# Altium PCB BuySellDisplay4Rev.PcbDoc (part 1 of 2)
Units mil, origin at the board's own origin, x right, y up, seen from the top; angles counter-clockwise.
Board outline 16511.81 x 6377.95 mil, 2 copper layers (Top Layer, Bottom Layer); 219 components, 209 nets, 584 pads, 70 vias.
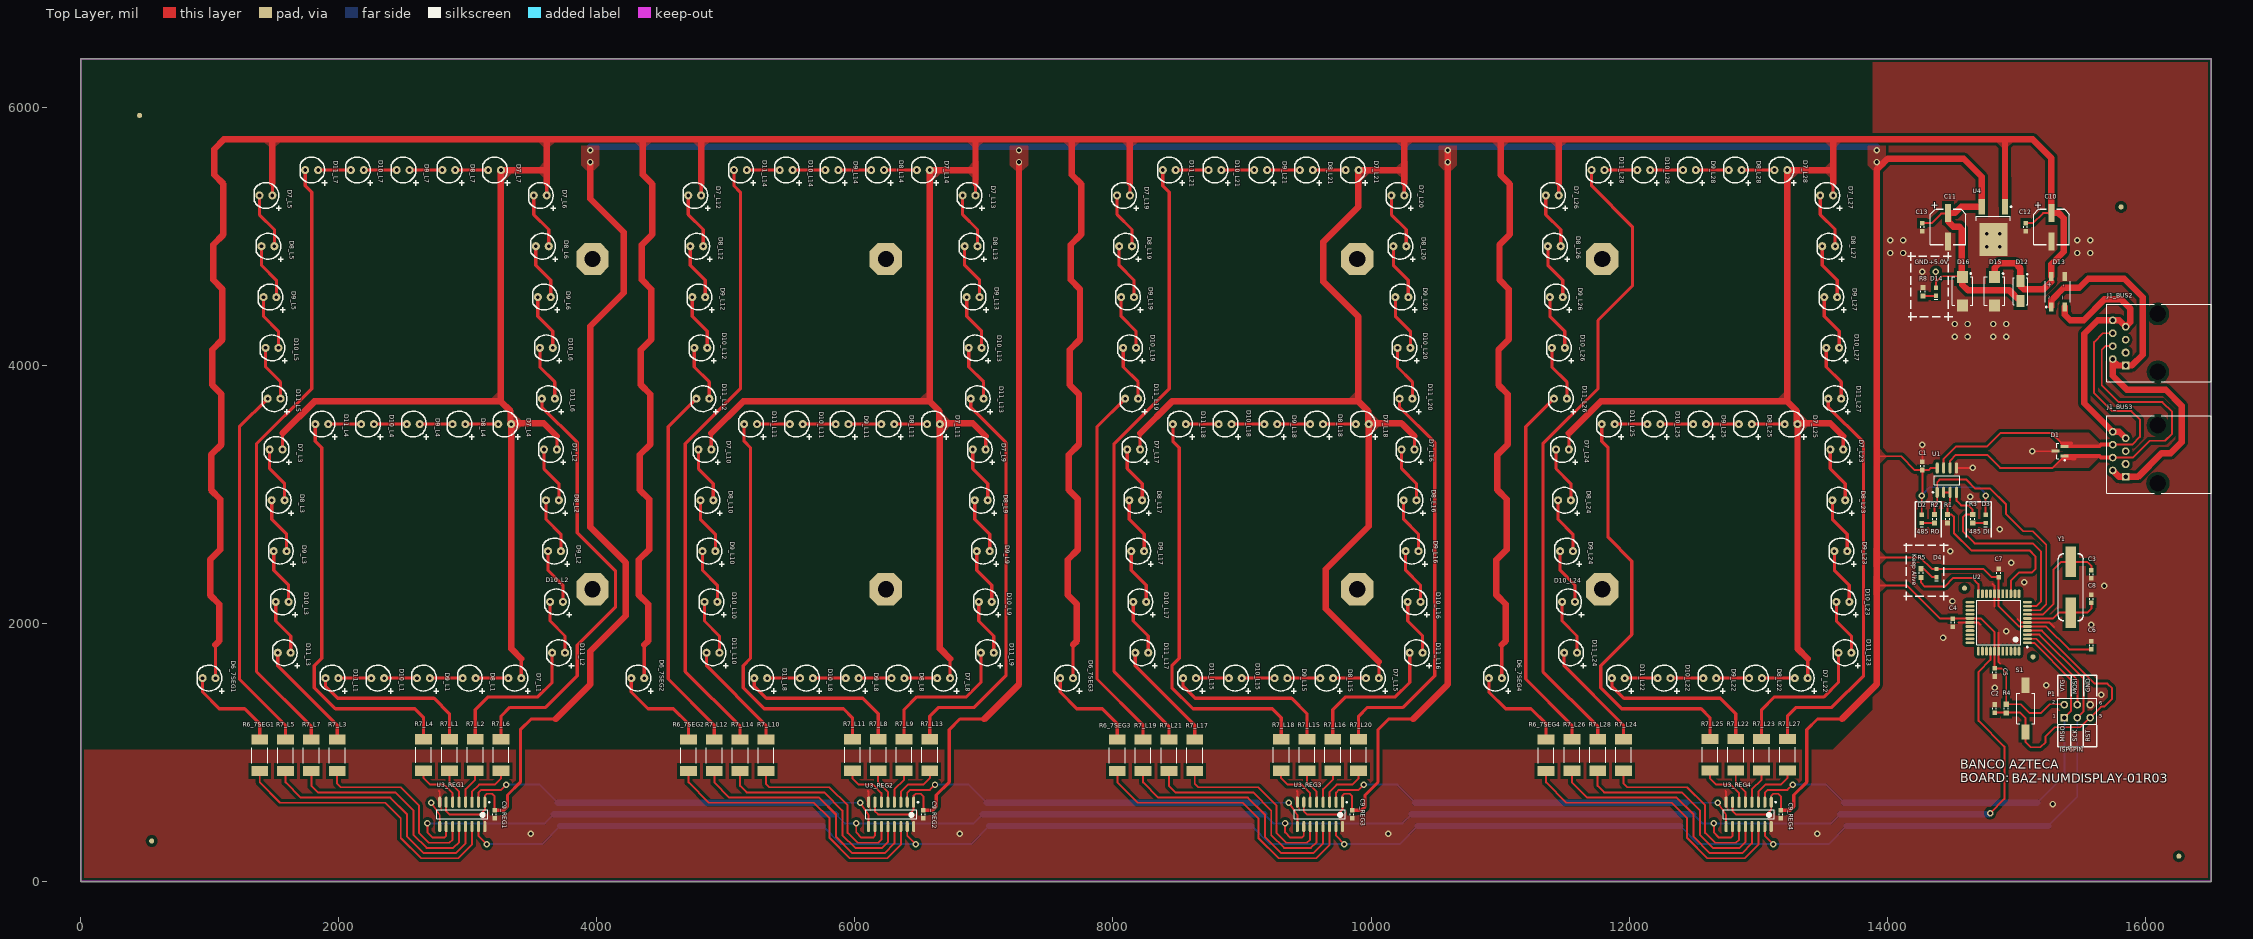
[diagram p0: Top Layer view]
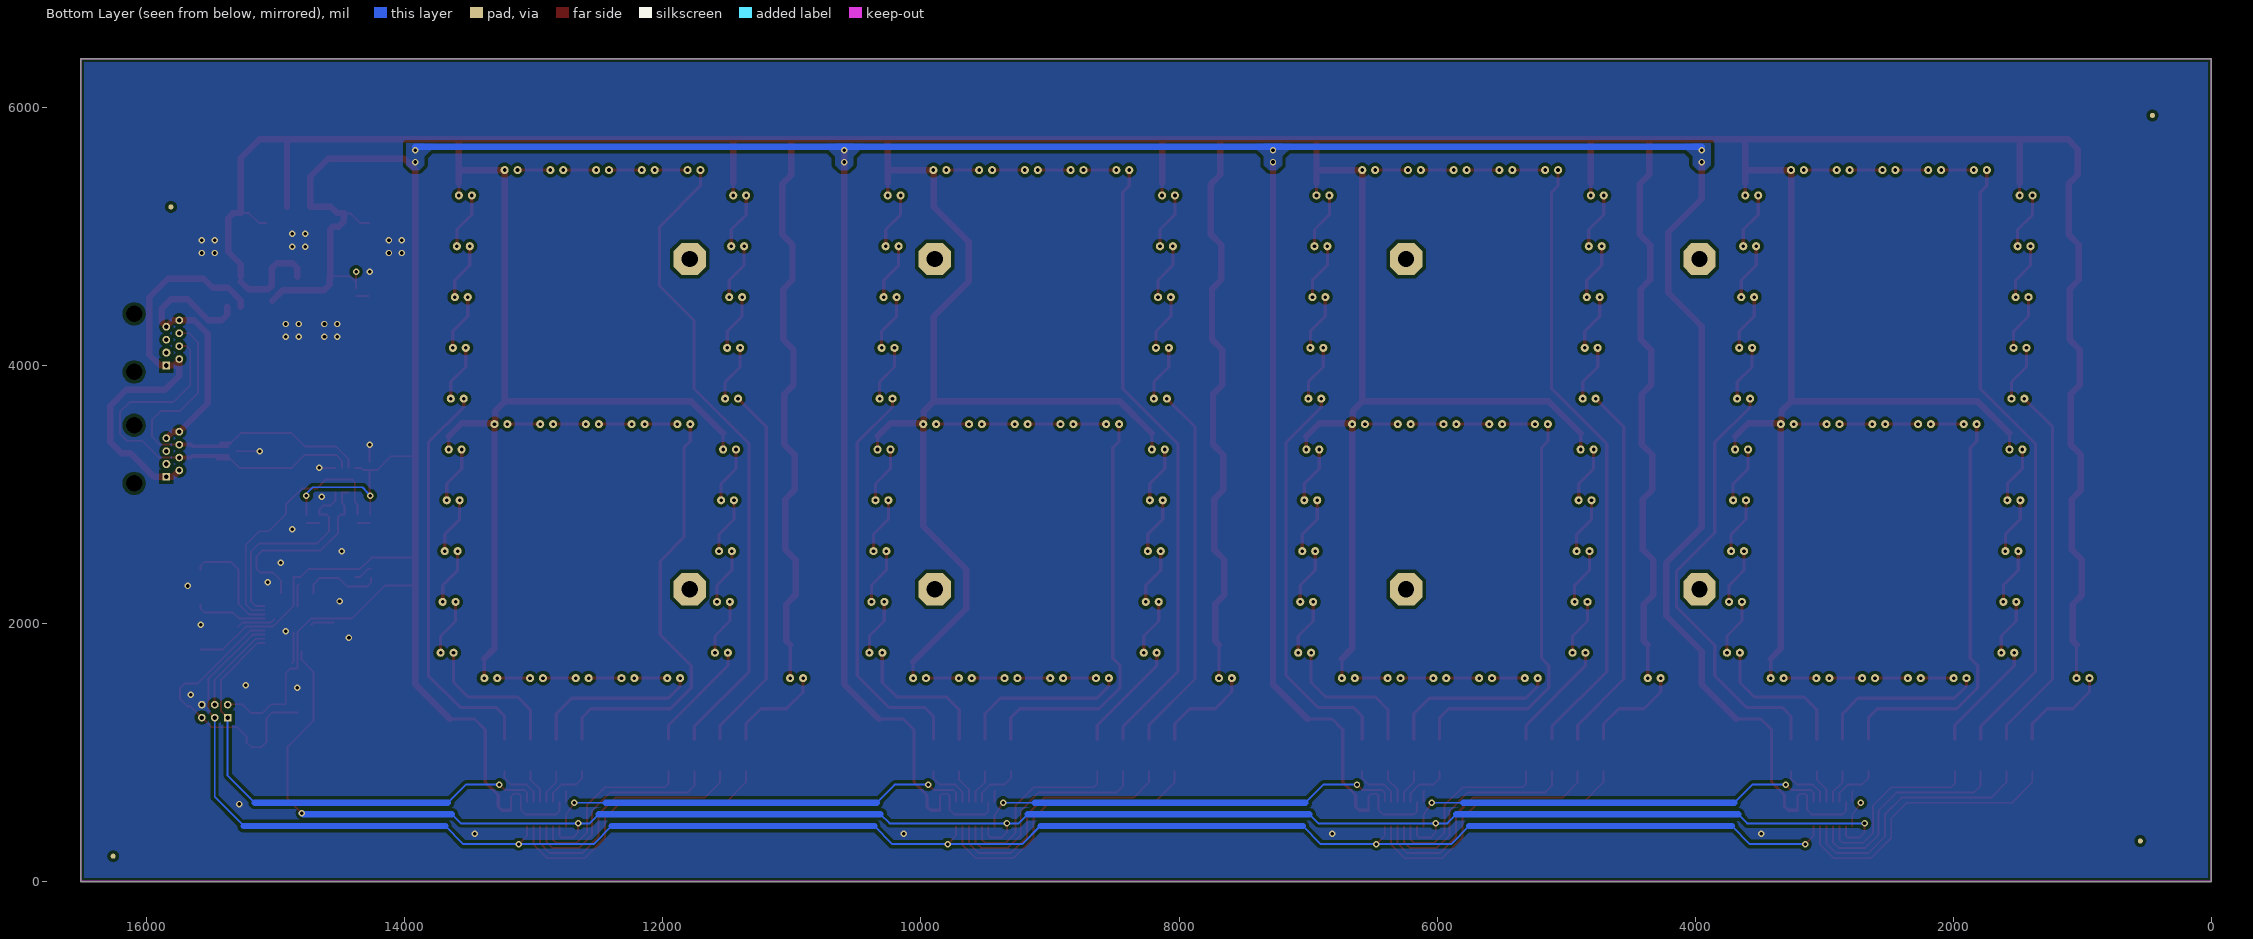
[diagram p1: Bottom Layer view, seen from below]

## Layer stack, top to bottom
Top Layer: signal copper 1.4
Dielectric: dielectric 12.6, FR-4, Dk 4.8
Bottom Layer: signal copper 1.4

## Board outline
16511.81,0 16511.81,6377.95 0,6377.95 0,0

## Design rules (kind name [scope] priority, off if disabled: settings)
Clearance [All] p1: gap=25
ComponentClearance [All] p1: gap=10 collisioncheckmode=3 verticalgap=10
PolygonConnect [All] p1: connectstyle=Direct reliefconductorwidth=15 reliefentries=4 polygonreliefangle="90 Angle"
RoomDefinition SUPPLY [InComponentClass('SUPPLY')] p1: confinementstyle=ConfineIn formatcopy=TRUE lockcomponents=FALSE outline -3977.55,-4179 -1977.55,-4179 -1977.55,-3179 -3977.55,-3179
RoomDefinition REG4 [InComponentClass('REG4')] p2: confinementstyle=ConfineIn formatcopy=TRUE lockcomponents=FALSE outline -3977.55,-4179 -1977.55,-4179 -1977.55,-3179 -3977.55,-3179
RoomDefinition REG3 [InComponentClass('REG3')] p3: confinementstyle=ConfineIn formatcopy=TRUE lockcomponents=FALSE outline -3977.55,-4179 -1977.55,-4179 -1977.55,-3179 -3977.55,-3179
RoomDefinition REG2 [InComponentClass('REG2')] p4: confinementstyle=ConfineIn formatcopy=TRUE lockcomponents=FALSE outline -3977.55,-4179 -1977.55,-4179 -1977.55,-3179 -3977.55,-3179
RoomDefinition REG1 [InComponentClass('REG1')] p5: confinementstyle=ConfineIn formatcopy=TRUE lockcomponents=FALSE outline -3977.55,-4179 -1977.55,-4179 -1977.55,-3179 -3977.55,-3179
RoomDefinition L28 [InComponentClass('L28')] p6: confinementstyle=ConfineIn formatcopy=TRUE lockcomponents=FALSE outline -3977.55,-4179 -1977.55,-4179 -1977.55,-3179 -3977.55,-3179
RoomDefinition L27 [InComponentClass('L27')] p7: confinementstyle=ConfineIn formatcopy=TRUE lockcomponents=FALSE outline -3977.55,-4179 -1977.55,-4179 -1977.55,-3179 -3977.55,-3179
RoomDefinition L26 [InComponentClass('L26')] p8: confinementstyle=ConfineIn formatcopy=TRUE lockcomponents=FALSE outline -3977.55,-4179 -1977.55,-4179 -1977.55,-3179 -3977.55,-3179
RoomDefinition L25 [InComponentClass('L25')] p9: confinementstyle=ConfineIn formatcopy=TRUE lockcomponents=FALSE outline -3977.55,-4179 -1977.55,-4179 -1977.55,-3179 -3977.55,-3179
RoomDefinition L24 [InComponentClass('L24')] p10: confinementstyle=ConfineIn formatcopy=TRUE lockcomponents=FALSE outline -3977.55,-4179 -1977.55,-4179 -1977.55,-3179 -3977.55,-3179
RoomDefinition L23 [InComponentClass('L23')] p11: confinementstyle=ConfineIn formatcopy=TRUE lockcomponents=FALSE outline -3977.55,-4179 -1977.55,-4179 -1977.55,-3179 -3977.55,-3179
RoomDefinition L22 [InComponentClass('L22')] p12: confinementstyle=ConfineIn formatcopy=TRUE lockcomponents=FALSE outline -3977.55,-4179 -1977.55,-4179 -1977.55,-3179 -3977.55,-3179
RoomDefinition L21 [InComponentClass('L21')] p13: confinementstyle=ConfineIn formatcopy=TRUE lockcomponents=FALSE outline -3977.55,-4179 -1977.55,-4179 -1977.55,-3179 -3977.55,-3179
RoomDefinition L20 [InComponentClass('L20')] p14: confinementstyle=ConfineIn formatcopy=TRUE lockcomponents=FALSE outline -3977.55,-4179 -1977.55,-4179 -1977.55,-3179 -3977.55,-3179
RoomDefinition L19 [InComponentClass('L19')] p15: confinementstyle=ConfineIn formatcopy=TRUE lockcomponents=FALSE outline -3977.55,-4179 -1977.55,-4179 -1977.55,-3179 -3977.55,-3179
RoomDefinition L18 [InComponentClass('L18')] p16: confinementstyle=ConfineIn formatcopy=TRUE lockcomponents=FALSE outline -3977.55,-4179 -1977.55,-4179 -1977.55,-3179 -3977.55,-3179
RoomDefinition L17 [InComponentClass('L17')] p17: confinementstyle=ConfineIn formatcopy=TRUE lockcomponents=FALSE outline -3977.55,-4179 -1977.55,-4179 -1977.55,-3179 -3977.55,-3179
RoomDefinition L16 [InComponentClass('L16')] p18: confinementstyle=ConfineIn formatcopy=TRUE lockcomponents=FALSE outline -3977.55,-4179 -1977.55,-4179 -1977.55,-3179 -3977.55,-3179
RoomDefinition L15 [InComponentClass('L15')] p19: confinementstyle=ConfineIn formatcopy=TRUE lockcomponents=FALSE outline -3977.55,-4179 -1977.55,-4179 -1977.55,-3179 -3977.55,-3179
RoomDefinition L14 [InComponentClass('L14')] p20: confinementstyle=ConfineIn formatcopy=TRUE lockcomponents=FALSE outline -3977.55,-4179 -1977.55,-4179 -1977.55,-3179 -3977.55,-3179
RoomDefinition L13 [InComponentClass('L13')] p21: confinementstyle=ConfineIn formatcopy=TRUE lockcomponents=FALSE outline -3977.55,-4179 -1977.55,-4179 -1977.55,-3179 -3977.55,-3179
RoomDefinition L12 [InComponentClass('L12')] p22: confinementstyle=ConfineIn formatcopy=TRUE lockcomponents=FALSE outline -3977.55,-4179 -1977.55,-4179 -1977.55,-3179 -3977.55,-3179
RoomDefinition L11 [InComponentClass('L11')] p23: confinementstyle=ConfineIn formatcopy=TRUE lockcomponents=FALSE outline -3977.55,-4179 -1977.55,-4179 -1977.55,-3179 -3977.55,-3179
RoomDefinition L10 [InComponentClass('L10')] p24: confinementstyle=ConfineIn formatcopy=TRUE lockcomponents=FALSE outline -3977.55,-4179 -1977.55,-4179 -1977.55,-3179 -3977.55,-3179
RoomDefinition L9 [InComponentClass('L9')] p25: confinementstyle=ConfineIn formatcopy=TRUE lockcomponents=FALSE outline -3977.55,-4179 -1977.55,-4179 -1977.55,-3179 -3977.55,-3179
RoomDefinition L8 [InComponentClass('L8')] p26: confinementstyle=ConfineIn formatcopy=TRUE lockcomponents=FALSE outline -3977.55,-4179 -1977.55,-4179 -1977.55,-3179 -3977.55,-3179
RoomDefinition L7 [InComponentClass('L7')] p27: confinementstyle=ConfineIn formatcopy=TRUE lockcomponents=FALSE outline -3977.55,-4179 -1977.55,-4179 -1977.55,-3179 -3977.55,-3179
RoomDefinition L6 [InComponentClass('L6')] p28: confinementstyle=ConfineIn formatcopy=TRUE lockcomponents=FALSE outline -3977.55,-4179 -1977.55,-4179 -1977.55,-3179 -3977.55,-3179
RoomDefinition L5 [InComponentClass('L5')] p29: confinementstyle=ConfineIn formatcopy=TRUE lockcomponents=FALSE outline -3977.55,-4179 -1977.55,-4179 -1977.55,-3179 -3977.55,-3179
RoomDefinition L4 [InComponentClass('L4')] p30: confinementstyle=ConfineIn formatcopy=TRUE lockcomponents=FALSE outline -3977.55,-4179 -1977.55,-4179 -1977.55,-3179 -3977.55,-3179
RoomDefinition L3 [InComponentClass('L3')] p31: confinementstyle=ConfineIn formatcopy=TRUE lockcomponents=FALSE outline -3977.55,-4179 -1977.55,-4179 -1977.55,-3179 -3977.55,-3179
RoomDefinition L2 [InComponentClass('L2')] p32: confinementstyle=ConfineIn formatcopy=TRUE lockcomponents=FALSE outline -3977.55,-4179 -1977.55,-4179 -1977.55,-3179 -3977.55,-3179
RoomDefinition L1 [InComponentClass('L1')] p33: confinementstyle=ConfineIn formatcopy=TRUE lockcomponents=FALSE outline -3977.55,-4179 -1977.55,-4179 -1977.55,-3179 -3977.55,-3179
RoomDefinition CPU [InComponentClass('CPU')] p34: confinementstyle=ConfineIn formatcopy=TRUE lockcomponents=FALSE outline -3977.55,-4179 -1977.55,-4179 -1977.55,-3179 -3977.55,-3179
RoomDefinition COM485 [InComponentClass('COM485')] p35: confinementstyle=ConfineIn formatcopy=TRUE lockcomponents=FALSE outline -3977.55,-4179 -1977.55,-4179 -1977.55,-3179 -3977.55,-3179
RoomDefinition BUS3 [InComponentClass('BUS3')] p36: confinementstyle=ConfineIn formatcopy=TRUE lockcomponents=FALSE outline -3977.55,-4179 -1977.55,-4179 -1977.55,-3179 -3977.55,-3179
RoomDefinition BUS2 [InComponentClass('BUS2')] p37: confinementstyle=ConfineIn formatcopy=TRUE lockcomponents=FALSE outline -3977.55,-4179 -1977.55,-4179 -1977.55,-3179 -3977.55,-3179
RoomDefinition 7SEG4 [InComponentClass('7SEG4')] p38: confinementstyle=ConfineIn formatcopy=TRUE lockcomponents=FALSE outline -3977.55,-4179 -1977.55,-4179 -1977.55,-3179 -3977.55,-3179
RoomDefinition 7SEG3 [InComponentClass('7SEG3')] p39: confinementstyle=ConfineIn formatcopy=TRUE lockcomponents=FALSE outline -3977.55,-4179 -1977.55,-4179 -1977.55,-3179 -3977.55,-3179
RoomDefinition 7SEG2 [InComponentClass('7SEG2')] p40: confinementstyle=ConfineIn formatcopy=TRUE lockcomponents=FALSE outline -3977.55,-4179 -1977.55,-4179 -1977.55,-3179 -3977.55,-3179
RoomDefinition 7SEG1 [InComponentClass('7SEG1')] p41: confinementstyle=ConfineIn formatcopy=TRUE lockcomponents=FALSE outline -3977.55,-4179 -1977.55,-4179 -1977.55,-3179 -3977.55,-3179
RoutingVias [All] p1: holewidth=28 width=50 viastyle="Through Hole" minholewidth=28 minwidth=50 maxholewidth=28 maxwidth=50
SolderMaskExpansion [All] p1: expansion=4
TestPointUsage [All] p1: valid=0 allowmultiple=FALSE
Testpoint [All] p1: side=15 testpointundercomponent=TRUE minsize=40 maxsize=100 preferedsize=60 minholesize=0 maxholesize=40 preferedholesize=32 testpointgrid=1 style=1023 order=0123456789
Width GROUND [(InNet('GND'))] p1: maxlimit=15 minlimit=10 preferedwidth=15
Width Drain [( InNet('SEGA_7SEG1') AND InNet('SEGB_7SEG1') AND InNet('SEGC_7SEG1') AND InNet('SEGD_7SEG1') AND InNet('SEGE_7SEG1') AND InNet('SEGF_7SEG1') AND InNet('SEGG_7SEG1') AND InNet('DOT_7SEG1') AND   InNet('SEGA_7SEG2') AND InNet('SEGB_7SEG2') AND InNet('SEGC_7SEG2') AND InNet('SEGD_7SEG2') AND InNet('SEGE_7SEG2') AND InNet('SEGF_7SEG2') AND InNet('SEGG_7SEG2') AND InNet('DOT_7SEG2') AND  InNet('SEGA_7SEG3') AND InNet('SEGB_7SEG3') AND InNet('SEGC_7SEG3') AND InNet('SEGD_7SEG3') AND InNet('SEGE_7SEG3') AND InNet('SEGF_7SEG3') AND InNet('SEGG_7SEG3') AND InNet('DOT_7SEG3') AND  InNet('SEGA_7SEG4') AND InNet('SEGB_7SEG4') AND InNet('SEGC_7SEG4') AND InNet('SEGD_7SEG4') AND InNet('SEGE_7SEG4') AND InNet('SEGF_7SEG4') AND InNet('SEGG_7SEG4') AND InNet('DOT_7SEG4')   )] p2: maxlimit=15 minlimit=15 preferedwidth=15
Width LEDS_7SEG [(InNet('NetD7_L1_K') AND InNet('NetD7_L2_K') AND InNet('NetD7_L3_K') AND InNet('NetD7_L4_K') AND InNet('NetD7_L5_K') AND InNet('NetD7_L6_K') AND InNet('NetD7_L7_K') AND InNet('NetD7_L8_K') AND InNet('NetD7_L9_K') AND InNet('NetD7_L10_K') AND InNet('NetD7_L11_K') AND InNet('NetD7_L12_K') AND InNet('NetD7_L13_K') AND InNet('NetD7_L14_K') AND InNet('NetD7_L15_K') AND InNet('NetD7_L16_K') AND InNet('NetD7_L17_K') AND InNet('NetD7_L18_K') AND InNet('NetD7_L19_K') AND InNet('NetD7_L20_K') AND InNet('NetD7_L21_K') AND InNet('NetD7_L22_K') AND InNet('NetD7_L23_K') AND InNet('NetD7_L24_K') AND InNet('NetD7_L25_K') AND InNet('NetD7_L26_K') AND InNet('NetD7_L27_K') AND InNet('NetD7_L28_K') AND   InNet('NetD8_L1_K') AND InNet('NetD8_L2_K') AND InNet('NetD8_L3_K') AND InNet('NetD8_L4_K') AND InNet('NetD8_L5_K') AND InNet('NetD8_L6_K') AND InNet('NetD8_L7_K') AND InNet('NetD8_L8_K') AND InNet('NetD8_L9_K') AND InNet('NetD8_L10_K') AND InNet('NetD8_L11_K') AND InNet('NetD8_L12_K') AND InNet('NetD8_L13_K') AND InNet('NetD8_L14_K') AND InNet('NetD8_L15_K') AND InNet('NetD8_L16_K') AND InNet('NetD8_L17_K') AND InNet('NetD8_L18_K') AND InNet('NetD8_L19_K') AND InNet('NetD8_L20_K') AND InNet('NetD8_L21_K') AND InNet('NetD8_L22_K') AND InNet('NetD8_L23_K') AND InNet('NetD8_L24_K') AND InNet('NetD8_L25_K') AND InNet('NetD8_L26_K') AND InNet('NetD8_L27_K') AND InNet('NetD8_L28_K') AND    InNet('NetD9_L1_K') AND InNet('NetD9_L2_K') AND InNet('NetD9_L3_K') AND InNet('NetD9_L4_K') AND InNet('NetD9_L5_K') AND InNet('NetD9_L6_K') AND InNet('NetD9_L7_K') AND InNet('NetD9_L8_K') AND InNet('NetD9_L9_K') AND InNet('NetD9_L10_K') AND InNet('NetD9_L11_K') AND InNet('NetD9_L12_K') AND InNet('NetD9_L13_K') AND InNet('NetD9_L14_K') AND InNet('NetD9_L15_K') AND InNet('NetD9_L16_K') AND InNet('NetD9_L17_K') AND InNet('NetD9_L18_K') AND InNet('NetD9_L19_K') AND InNet('NetD9_L20_K') AND InNet('NetD9_L21_K') AND InNet('NetD9_L22_K') AND InNet('NetD9_L23_K') AND InNet('NetD9_L24_K') AND InNet('NetD9_L25_K') AND InNet('NetD9_L26_K') AND InNet('NetD9_L27_K') AND InNet('NetD9_L28_K') AND    InNet('NetD10_L1_K') AND InNet('NetD10_L2_K') AND InNet('NetD10_L3_K') AND InNet('NetD10_L4_K') AND InNet('NetD10_L5_K') AND InNet('NetD10_L6_K') AND InNet('NetD10_L7_K') AND InNet('NetD10_L8_K') AND InNet('NetD10_L9_K') AND InNet('NetD10_L10_K') AND InNet('NetD10_L11_K') AND InNet('NetD10_L12_K') AND InNet('NetD10_L13_K') AND InNet('NetD10_L14_K') AND InNet('NetD10_L15_K') AND InNet('NetD10_L16_K') AND InNet('NetD10_L17_K') AND InNet('NetD10_L18_K') AND InNet('NetD10_L19_K') AND InNet('NetD10_L20_K') AND InNet('NetD10_L21_K') AND InNet('NetD10_L22_K') AND InNet('NetD10_L23_K') AND InNet('NetD10_L24_K') AND InNet('NetD10_L25_K') AND InNet('NetD10_L26_K') AND InNet('NetD10_L27_K') AND InNet('NetD10_L28_K') AND    InNet('NetD11_L1_K') AND InNet('NetD11_L2_K') AND InNet('NetD11_L3_K') AND InNet('NetD11_L4_K') AND InNet('NetD11_L5_K') AND InNet('NetD11_L6_K') AND InNet('NetD11_L7_K') AND InNet('NetD11_L8_K') AND InNet('NetD11_L9_K') AND InNet('NetD11_L10_K') AND InNet('NetD11_L11_K') AND InNet('NetD11_L12_K') AND InNet('NetD11_L13_K') AND InNet('NetD11_L14_K') AND InNet('NetD11_L15_K') AND InNet('NetD11_L16_K') AND InNet('NetD11_L17_K') AND InNet('NetD11_L18_K') AND InNet('NetD11_L19_K') AND InNet('NetD11_L20_K') AND InNet('NetD11_L21_K') AND InNet('NetD11_L22_K') AND InNet('NetD11_L23_K') AND InNet('NetD11_L24_K') AND InNet('NetD11_L25_K') AND InNet('NetD11_L26_K') AND InNet('NetD11_L27_K') AND InNet('NetD11_L28_K')  )] p3: maxlimit=50 minlimit=20 preferedwidth=50
Width Power [(InNet('POWER_V+') AND InNet('POWER_V-'))] p4: maxlimit=50 minlimit=25 preferedwidth=50
18 further rules are at their usual default settings.

## Classes and differential pairs
component class BUS2: J1_BUS1 J1_BUS2
component class BUS3: J1_BUS3
component class REG1: C9_REG1 U3_REG1
component class REG2: C9_REG2 U3_REG2
component class REG3: C9_REG3 U3_REG3
component class REG4: C9_REG4 U3_REG4
channel class TPIC6B595_CommunicationInterface: REG1 REG2 REG3 REG4
channel class Line: L1 L2 L3 L4 L5 L6 L7 L8 L9 L10 L11 L12 L13 L14 L15 L16 L17 L18 L19 L20 L21 L22 L23 L24 L25 L26 L27 L28
channel class Led7Seg: 7SEG1 7SEG2 7SEG3 7SEG4
channel class BUSConnector: BUS2 BUS3
component class SUPPLY: C10 C11 C12 C13 D12 D13 D14 D15 D16 R8 U4
component class L28: D7_L28 D8_L28 D9_L28 D10_L28 D11_L28 R7_L28
component class L27: D7_L27 D8_L27 D9_L27 D10_L27 D11_L27 R7_L27
component class L26: D7_L26 D8_L26 D9_L26 D10_L26 D11_L26 R7_L26
component class L25: D7_L25 D8_L25 D9_L25 D10_L25 D11_L25 R7_L25
component class L24: D7_L24 D8_L24 D9_L24 D10_L24 D11_L24 R7_L24
component class L23: D7_L23 D8_L23 D9_L23 D10_L23 D11_L23 R7_L23
component class L22: D7_L22 D8_L22 D9_L22 D10_L22 D11_L22 R7_L22
component class L21: D7_L21 D8_L21 D9_L21 D10_L21 D11_L21 R7_L21
component class L20: D7_L20 D8_L20 D9_L20 D10_L20 D11_L20 R7_L20
component class L19: D7_L19 D8_L19 D9_L19 D10_L19 D11_L19 R7_L19
component class L18: D7_L18 D8_L18 D9_L18 D10_L18 D11_L18 R7_L18
component class L17: D7_L17 D8_L17 D9_L17 D10_L17 D11_L17 R7_L17
component class L16: D7_L16 D8_L16 D9_L16 D10_L16 D11_L16 R7_L16
component class L15: D7_L15 D8_L15 D9_L15 D10_L15 D11_L15 R7_L15
component class L14: D7_L14 D8_L14 D9_L14 D10_L14 D11_L14 R7_L14
component class L13: D7_L13 D8_L13 D9_L13 D10_L13 D11_L13 R7_L13
component class L12: D7_L12 D8_L12 D9_L12 D10_L12 D11_L12 R7_L12
component class L11: D7_L11 D8_L11 D9_L11 D10_L11 D11_L11 R7_L11
component class L10: D7_L10 D8_L10 D9_L10 D10_L10 D11_L10 R7_L10
component class L9: D7_L9 D8_L9 D9_L9 D10_L9 D11_L9 R7_L9
component class L8: D7_L8 D8_L8 D9_L8 D10_L8 D11_L8 R7_L8
component class L7: D7_L7 D8_L7 D9_L7 D10_L7 D11_L7 R7_L7
component class L6: D7_L6 D8_L6 D9_L6 D10_L6 D11_L6 R7_L6
component class L5: D7_L5 D8_L5 D9_L5 D10_L5 D11_L5 R7_L5
component class L4: D7_L4 D8_L4 D9_L4 D10_L4 D11_L4 R7_L4
component class L3: D7_L3 D8_L3 D9_L3 D10_L3 D11_L3 R7_L3
component class L2: D7_L2 D8_L2 D9_L2 D10_L2 D11_L2 R7_L2
component class L1: D7_L1 D8_L1 D9_L1 D10_L1 D11_L1 R7_L1
component class CPU: C2 C3 C4 C5 C6 C7 C8 D4 P1 R4 R5 S1 U2 Y1
component class COM485: C1 D1 D2 D3 R1 R2 R3 U1
component class 7SEG4: D6_7SEG4 R6_7SEG4
component class 7SEG3: D6_7SEG3 R6_7SEG3
component class 7SEG2: D6_7SEG2 R6_7SEG2
component class 7SEG1: D6_7SEG1 R6_7SEG1

## Components (designator, comment, footprint, x,y, rotation, side; value= is the part's Value field where it differs from the comment)
C1 "CAP0.1uF" CAP0603 14272.45,3221 r90 top
C2 "CAP0.1uF" CAP0603 14832.45,1341 r90 top
C3 "CAP18pF" CAP0603 15582.45,2381 r270 top
C4 "CAP0.1uF" CAP0603 14509.38,2006.63 r270 top
C5 "CAP0.1uF" CAP0603 14832.45,1621 r270 top
C6 "CAP0.1uF" CAP0603 15582.45,1831 r90 top
C7 "CAP0.1uF" CAP0603 14864.38,2391.63 r90 top
C8 "CAP18pF" CAP0603 15582.45,2191 r90 top
C9_REG1 "CAP0.1uF" CAP0603 3208.32,521 r270 top (schematic designator C9)
C9_REG2 "CAP0.1uF" CAP0603 6531.03,521 r270 top (schematic designator C9)
C9_REG3 "CAP0.1uF" CAP0603 9853.74,521 r270 top (schematic designator C9)
C9_REG4 "CAP0.1uF" CAP0603 13176.45,521 r270 top (schematic designator C9)
C10 "CAP100uF" EEH-ZA1E101XP 15272.45,5071 r270 top
C11 "CAP47uF" EEH-ZA1E101XP 14472.45,5071 r270 top
C12 "CAP0.1uF" CAP0603 15072.45,5071 r270 top
C13 "CAP0.1uF" CAP0603 14272.45,5071 r270 top
D1 "SM712-02HTG" SW712 15339.61,3336 r180 top
D2 "LEDY" 150060YS75000 14267.45,2811 r90 top
D3 "LEDY" 150060YS75000 14762.45,2811 r90 top
D4 "LEDY" 150060YS75000 14382.45,2391 r90 top
D6_7SEG1 "Oval Led" LED 1045.46,1576.91 r180 top (schematic designator D6)
D6_7SEG2 "Oval Led" LED 4368.17,1576.91 r180 top (schematic designator D6)
D6_7SEG3 "Oval Led" LED 7690.88,1576.91 r180 top (schematic designator D6)
D6_7SEG4 "Oval Led" LED 11013.58,1576.91 r180 top (schematic designator D6)
D7_L1 "Oval Led" LED 3415.48,1576.91 r180 top (schematic designator D7)
D7_L2 "Oval Led" LED 3691,3348.56 r180 top (schematic designator D7)
D7_L3 "Oval Led" LED 1565.15,3348.56 r180 top (schematic designator D7)
D7_L4 "Oval Led" LED 3336.74,3545.41 r180 top (schematic designator D7)
D7_L5 "Oval Led" LED 1486.41,5317.06 r180 top (schematic designator D7)
D7_L6 "Oval Led" LED 3612.26,5317.06 r180 top (schematic designator D7)
D7_L7 "Oval Led" LED 3258,5513.91 r180 top (schematic designator D7)
D7_L8 "Oval Led" LED 6738.18,1576.91 r180 top (schematic designator D7)
D7_L9 "Oval Led" LED 7013.71,3348.56 r180 top (schematic designator D7)
D7_L10 "Oval Led" LED 4887.85,3348.56 r180 top (schematic designator D7)
D7_L11 "Oval Led" LED 6659.44,3545.41 r180 top (schematic designator D7)
D7_L12 "Oval Led" LED 4809.11,5317.06 r180 top (schematic designator D7)
D7_L13 "Oval Led" LED 6934.97,5317.06 r180 top (schematic designator D7)
D7_L14 "Oval Led" LED 6580.7,5513.91 r180 top (schematic designator D7)
D7_L15 "Oval Led" LED 10060.89,1576.91 r180 top (schematic designator D7)
D7_L16 "Oval Led" LED 10336.42,3348.56 r180 top (schematic designator D7)
D7_L17 "Oval Led" LED 8210.56,3348.56 r180 top (schematic designator D7)
D7_L18 "Oval Led" LED 9982.28,3545.41 r180 top (schematic designator D7)
D7_L19 "Oval Led" LED 8131.82,5317.06 r180 top (schematic designator D7)
D7_L20 "Oval Led" LED 10257.68,5317.06 r180 top (schematic designator D7)
D7_L21 "Oval Led" LED 9903.41,5513.91 r180 top (schematic designator D7)
D7_L22 "Oval Led" LED 13383.6,1576.91 r180 top (schematic designator D7)
D7_L23 "Oval Led" LED 13659.12,3348.56 r180 top (schematic designator D7)
D7_L24 "Oval Led" LED 11533.27,3348.56 r180 top (schematic designator D7)
D7_L25 "Oval Led" LED 13304.86,3545.41 r180 top (schematic designator D7)
D7_L26 "Oval Led" LED 11454.53,5317.06 r180 top (schematic designator D7)
D7_L27 "Oval Led" LED 13580.38,5317.06 r180 top (schematic designator D7)
D7_L28 "Oval Led" LED 13226.12,5513.91 r180 top (schematic designator D7)
D8_L1 "Oval Led" LED 3061.15,1576.91 r180 top (schematic designator D8)
D8_L2 "Oval Led" LED 3706.75,2954.86 r180 top (schematic designator D8)
D8_L3 "Oval Led" LED 1580.89,2954.86 r180 top (schematic designator D8)
D8_L4 "Oval Led" LED 2982.41,3545.41 r180 top (schematic designator D8)
D8_L5 "Oval Led" LED 1502.15,4923.36 r180 top (schematic designator D8)
D8_L6 "Oval Led" LED 3628.01,4923.36 r180 top (schematic designator D8)
D8_L7 "Oval Led" LED 2903.67,5513.91 r180 top (schematic designator D8)
D8_L8 "Oval Led" LED 6383.85,1576.91 r180 top (schematic designator D8)
D8_L9 "Oval Led" LED 7029.46,2954.86 r180 top (schematic designator D8)
D8_L10 "Oval Led" LED 4903.6,2954.86 r180 top (schematic designator D8)
D8_L11 "Oval Led" LED 6305.11,3545.41 r180 top (schematic designator D8)
D8_L12 "Oval Led" LED 4824.86,4923.36 r180 top (schematic designator D8)
D8_L13 "Oval Led" LED 6950.72,4923.36 r180 top (schematic designator D8)
D8_L14 "Oval Led" LED 6226.37,5513.91 r180 top (schematic designator D8)
D8_L15 "Oval Led" LED 9706.56,1576.91 r180 top (schematic designator D8)
D8_L16 "Oval Led" LED 10352.16,2954.86 r180 top (schematic designator D8)
D8_L17 "Oval Led" LED 8226.31,2954.86 r180 top (schematic designator D8)
D8_L18 "Oval Led" LED 9627.82,3545.41 r180 top (schematic designator D8)
D8_L19 "Oval Led" LED 8147.57,4923.36 r180 top (schematic designator D8)
D8_L20 "Oval Led" LED 10273.42,4923.36 r180 top (schematic designator D8)
D8_L21 "Oval Led" LED 9549.08,5513.91 r180 top (schematic designator D8)
D8_L22 "Oval Led" LED 13029.27,1576.91 r180 top (schematic designator D8)
D8_L23 "Oval Led" LED 13674.87,2954.86 r180 top (schematic designator D8)
D8_L24 "Oval Led" LED 11549.08,2954.86 r180 top (schematic designator D8)
D8_L25 "Oval Led" LED 12950.59,3545.41 r180 top (schematic designator D8)
D8_L26 "Oval Led" LED 11470.34,4923.36 r180 top (schematic designator D8)
D8_L27 "Oval Led" LED 13596.13,4923.36 r180 top (schematic designator D8)
D8_L28 "Oval Led" LED 12871.85,5513.91 r180 top (schematic designator D8)
D9_L1 "Oval Led" LED 2706.81,1576.91 r180 top (schematic designator D9)
D9_L2 "Oval Led" LED 3722.43,2561.16 r180 top (schematic designator D9)
D9_L3 "Oval Led" LED 1596.58,2561.16 r180 top (schematic designator D9)
D9_L4 "Oval Led" LED 2628.07,3545.41 r180 top (schematic designator D9)
D9_L5 "Oval Led" LED 1517.84,4529.66 r180 top (schematic designator D9)
D9_L6 "Oval Led" LED 3643.69,4529.66 r180 top (schematic designator D9)
D9_L7 "Oval Led" LED 2549.33,5513.91 r180 top (schematic designator D9)
D9_L8 "Oval Led" LED 6029.52,1576.91 r180 top (schematic designator D9)
D9_L9 "Oval Led" LED 7045.14,2561.16 r180 top (schematic designator D9)
D9_L10 "Oval Led" LED 4919.29,2561.16 r180 top (schematic designator D9)
D9_L11 "Oval Led" LED 5950.78,3545.41 r180 top (schematic designator D9)
D9_L12 "Oval Led" LED 4840.55,4529.66 r180 top (schematic designator D9)
D9_L13 "Oval Led" LED 6966.4,4529.66 r180 top (schematic designator D9)
D9_L14 "Oval Led" LED 5872.04,5513.91 r180 top (schematic designator D9)
D9_L15 "Oval Led" LED 9352.29,1576.91 r180 top (schematic designator D9)
D9_L16 "Oval Led" LED 10367.85,2561.16 r180 top (schematic designator D9)
D9_L17 "Oval Led" LED 8242,2561.16 r180 top (schematic designator D9)
D9_L18 "Oval Led" LED 9273.49,3545.41 r180 top (schematic designator D9)
D9_L19 "Oval Led" LED 8163.26,4529.66 r180 top (schematic designator D9)
D9_L20 "Oval Led" LED 10289.11,4529.66 r180 top (schematic designator D9)
D9_L21 "Oval Led" LED 9194.75,5513.91 r180 top (schematic designator D9)
D9_L22 "Oval Led" LED 12675,1576.91 r180 top (schematic designator D9)
D9_L23 "Oval Led" LED 13690.56,2561.16 r180 top (schematic designator D9)
D9_L24 "Oval Led" LED 11564.77,2561.16 r180 top (schematic designator D9)
D9_L25 "Oval Led" LED 12596.26,3545.41 r180 top (schematic designator D9)
D9_L26 "Oval Led" LED 11486.03,4529.66 r180 top (schematic designator D9)
D9_L27 "Oval Led" LED 13611.82,4529.66 r180 top (schematic designator D9)
D9_L28 "Oval Led" LED 12517.46,5513.91 r180 top (schematic designator D9)
D10_L1 "Oval Led" LED 2352.48,1576.91 r180 top (schematic designator D10)
D10_L2 "Oval Led" LED 3738.24,2167.46 r180 top (schematic designator D10)
D10_L3 "Oval Led" LED 1612.39,2167.46 r180 top (schematic designator D10)
D10_L4 "Oval Led" LED 2273.74,3545.41 r180 top (schematic designator D10)
D10_L5 "Oval Led" LED 1533.65,4135.96 r180 top (schematic designator D10)
D10_L6 "Oval Led" LED 3659.5,4135.96 r180 top (schematic designator D10)
D10_L7 "Oval Led" LED 2195,5513.91 r180 top (schematic designator D10)
D10_L8 "Oval Led" LED 5675.19,1576.91 r180 top (schematic designator D10)
D10_L9 "Oval Led" LED 7060.95,2167.46 r180 top (schematic designator D10)
D10_L10 "Oval Led" LED 4935.1,2167.46 r180 top (schematic designator D10)
D10_L11 "Oval Led" LED 5596.45,3545.41 r180 top (schematic designator D10)
D10_L12 "Oval Led" LED 4856.36,4135.96 r180 top (schematic designator D10)
D10_L13 "Oval Led" LED 6982.21,4135.96 r180 top (schematic designator D10)
D10_L14 "Oval Led" LED 5517.71,5513.91 r180 top (schematic designator D10)
D10_L15 "Oval Led" LED 8997.96,1576.91 r180 top (schematic designator D10)
D10_L16 "Oval Led" LED 10383.66,2167.46 r180 top (schematic designator D10)
D10_L17 "Oval Led" LED 8257.81,2167.46 r180 top (schematic designator D10)
D10_L18 "Oval Led" LED 8919.16,3545.41 r180 top (schematic designator D10)
D10_L19 "Oval Led" LED 8179.07,4135.96 r180 top (schematic designator D10)
D10_L20 "Oval Led" LED 10304.92,4135.96 r180 top (schematic designator D10)
D10_L21 "Oval Led" LED 8840.42,5513.91 r180 top (schematic designator D10)
D10_L22 "Oval Led" LED 12320.67,1576.91 r180 top (schematic designator D10)
D10_L23 "Oval Led" LED 13706.37,2167.46 r180 top (schematic designator D10)
D10_L24 "Oval Led" LED 11580.51,2167.46 r180 top (schematic designator D10)
D10_L25 "Oval Led" LED 12241.87,3545.41 r180 top (schematic designator D10)
D10_L26 "Oval Led" LED 11501.84,4135.96 r180 top (schematic designator D10)
D10_L27 "Oval Led" LED 13627.57,4135.96 r180 top (schematic designator D10)
D10_L28 "Oval Led" LED 12163.19,5513.91 r180 top (schematic designator D10)
D11_L1 "Oval Led" LED 1998.15,1576.91 r180 top (schematic designator D11)
D11_L2 "Oval Led" LED 3753.99,1773.76 r180 top (schematic designator D11)
D11_L3 "Oval Led" LED 1628.14,1773.76 r180 top (schematic designator D11)
D11_L4 "Oval Led" LED 1919.41,3545.41 r180 top (schematic designator D11)
D11_L5 "Oval Led" LED 1549.4,3742.26 r180 top (schematic designator D11)
D11_L6 "Oval Led" LED 3675.19,3742.26 r180 top (schematic designator D11)
D11_L7 "Oval Led" LED 1840.67,5513.91 r180 top (schematic designator D11)
D11_L8 "Oval Led" LED 5320.86,1576.91 r180 top (schematic designator D11)
D11_L9 "Oval Led" LED 7076.7,1773.76 r180 top (schematic designator D11)
D11_L10 "Oval Led" LED 4950.85,1773.76 r180 top (schematic designator D11)
D11_L11 "Oval Led" LED 5242.12,3545.41 r180 top (schematic designator D11)
D11_L12 "Oval Led" LED 4872.11,3742.26 r180 top (schematic designator D11)
D11_L13 "Oval Led" LED 6997.9,3742.26 r180 top (schematic designator D11)
D11_L14 "Oval Led" LED 5163.38,5513.91 r180 top (schematic designator D11)
D11_L15 "Oval Led" LED 8643.57,1576.91 r180 top (schematic designator D11)
D11_L16 "Oval Led" LED 10399.41,1773.76 r180 top (schematic designator D11)
D11_L17 "Oval Led" LED 8273.55,1773.76 r180 top (schematic designator D11)
D11_L18 "Oval Led" LED 8564.83,3545.41 r180 top (schematic designator D11)
D11_L19 "Oval Led" LED 8194.81,3742.26 r180 top (schematic designator D11)
D11_L20 "Oval Led" LED 10320.61,3742.26 r180 top (schematic designator D11)
D11_L21 "Oval Led" LED 8486.09,5513.91 r180 top (schematic designator D11)
D11_L22 "Oval Led" LED 11966.28,1576.91 r180 top (schematic designator D11)
D11_L23 "Oval Led" LED 13722.12,1773.76 r180 top (schematic designator D11)
D11_L24 "Oval Led" LED 11596.26,1773.76 r180 top (schematic designator D11)
D11_L25 "Oval Led" LED 11887.54,3545.41 r180 top (schematic designator D11)
D11_L26 "Oval Led" LED 11517.52,3742.26 r180 top (schematic designator D11)
D11_L27 "Oval Led" LED 13643.31,3742.26 r180 top (schematic designator D11)
D11_L28 "Oval Led" LED 11808.8,5513.91 r180 top (schematic designator D11)
D12 "S1M-E3/5AT" S1M-E3/5AT 15032.45,4576 r270 top
D13 "MB6S-E3/80" MB6S-E3/80 15322.45,4571 r90 top
D14 "LEDY" 150060YS75000 14377.45,4571 r90 top
D15 "TVS12V" SMBJ5.0A 14832.45,4576 r270 top
D16 "TVS5.0V" SMBJ5.0A 14582.45,4576 r270 top
J1_BUS2 "RJ45" 15-43-6233 16512.45,4174.39 r90 top (schematic designator J1)
J1_BUS3 "RJ45" 15-43-6233 16512.41,3311 r90 top (schematic designator J1)
P1 "ISP" HDR2X3 15372.45,1271 r0 top
R1 "RES4.7K" RES0603 14467.45,2811 r270 top
R2 "RES4.7K" RES0603 14367.45,2811 r90 top
R3 "RES4.7K" RES0603 14662.45,2811 r90 top
R4 "RES4.7K" RES0603 14922.45,1341 r90 top
R5 "RES4.7K" RES0603 14262.45,2391 r90 top
R6_7SEG1 "RES470" RES2512 1388.44,978.12 r270 top (schematic designator R6)
R6_7SEG2 "RES470" RES2512 4711.15,978.12 r270 top (schematic designator R6)
R6_7SEG3 "RES470" RES2512 8033.86,978.12 r270 top (schematic designator R6)
R6_7SEG4 "RES470" RES2512 11356.56,978.12 r270 top (schematic designator R6)
R7_L1 "RES120" RES2512 2858.32,981 r270 top (schematic designator R7)
R7_L2 "RES120" RES2512 3058.32,981 r270 top (schematic designator R7)
R7_L3 "RES120" RES2512 1988.44,978.12 r270 top (schematic designator R7)
R7_L4 "RES120" RES2512 2658.32,981 r270 top (schematic designator R7)
R7_L5 "RES120" RES2512 1588.44,978.12 r270 top (schematic designator R7)
R7_L6 "RES120" RES2512 3258.32,981 r270 top (schematic designator R7)
R7_L7 "RES120" RES2512 1788.44,978.12 r270 top (schematic designator R7)
R7_L8 "RES120" RES2512 6181.03,981 r270 top (schematic designator R7)
R7_L9 "RES120" RES2512 6381.03,981 r270 top (schematic designator R7)
R7_L10 "RES120" RES2512 5311.15,978.12 r270 top (schematic designator R7)
R7_L11 "RES120" RES2512 5981.03,981 r270 top (schematic designator R7)
R7_L12 "RES120" RES2512 4911.15,978.12 r270 top (schematic designator R7)
R7_L13 "RES120" RES2512 6581.03,981 r270 top (schematic designator R7)
R7_L14 "RES120" RES2512 5111.15,978.12 r270 top (schematic designator R7)
R7_L15 "RES120" RES2512 9503.74,981 r270 top (schematic designator R7)
R7_L16 "RES120" RES2512 9703.74,981 r270 top (schematic designator R7)
R7_L17 "RES120" RES2512 8633.86,978.12 r270 top (schematic designator R7)
R7_L18 "RES120" RES2512 9303.74,981 r270 top (schematic designator R7)
R7_L19 "RES120" RES2512 8233.86,978.12 r270 top (schematic designator R7)
R7_L20 "RES120" RES2512 9903.74,981 r270 top (schematic designator R7)
R7_L21 "RES120" RES2512 8433.86,978.12 r270 top (schematic designator R7)
R7_L22 "RES120" RES2512 12826.45,983.95 r270 top (schematic designator R7)
R7_L23 "RES120" RES2512 13026.45,983.95 r270 top (schematic designator R7)
R7_L24 "RES120" RES2512 11956.56,981.07 r270 top (schematic designator R7)
R7_L25 "RES120" RES2512 12626.45,983.95 r270 top (schematic designator R7)
R7_L26 "RES120" RES2512 11556.56,981.07 r270 top (schematic designator R7)
R7_L27 "RES120" RES2512 13226.45,983.95 r270 top (schematic designator R7)
R7_L28 "RES120" RES2512 11756.56,981.07 r270 top (schematic designator R7)
R8 "RES4.7K" RES0603 14277.45,4571 r90 top
S1 "SW-PB" microswitch 15072.45,1341 r90 top
U1 "MAX485CSA" NSO8_N 14462.45,3111 r90 top
U2 "ATmega1284P-AU" 44A_N 14863.55,2008.05 r180 top
U3_REG1 "POWER SHIFT REG" NPIC6C595_Q100_SOIC16 2958.32,521 r270 top (schematic designator U3)
U3_REG2 "POWER SHIFT REG" NPIC6C595_Q100_SOIC16 6281.03,521 r270 top (schematic designator U3)
U3_REG3 "POWER SHIFT REG" NPIC6C595_Q100_SOIC16 9603.74,521 r270 top (schematic designator U3)
U3_REG4 "POWER SHIFT REG" NPIC6C595_Q100_SOIC16 12926.45,521 r270 top (schematic designator U3)
U4 "MC7805CDTRKG" MC7805CDTRKG 14822.45,5071 r270 top
Y1 "XTAL" Crystal20MHz 15422.45,2281 r90 top

## Footprints (in the part's own frame and the unit in brackets; to place one, negate y for a bottom-side part, rotate by r counter-clockwise, add the part's x,y. Pads: shape width x height; smd on the part's side, far side on the other; paste and mask are expansions set on the pad)
15-43-6233 [mm] "Connector; PCB Jack, Thru-Hole; 1-Port; Unshielded without Lightpipes; Right Angle"
  rect 1.5x1.5 hole 0.9: 1(-4.445,16.89)
  round 1.5 hole 0.9: 2(-3.175,19.43) 4(-0.635,19.43) 5(0.635,16.89) 6(1.905,19.43) 7(3.175,16.89) 8(4.445,19.43)
  round 1.6 hole 0.9: 3(-1.905,16.89)
  round 2.95 hole 3.25 unplated: MH1(-5.715,10.54) MH2(5.715,10.54)
  silkscreen extent -7.62,0 7.62,20.58
44A_N [mm] "Thin QFP, 44-Leads, Body 10x10mm, Pitch 0.8mm, IPC Medium Density"
  oval 1.75x0.55 smd: 1(-5.65,4) 2(-5.65,3.2) 3(-5.65,2.4) 4(-5.65,1.6) 5(-5.65,0.8) 6(-5.65,0) 7(-5.65,-0.8) 8(-5.65,-1.6) 9(-5.65,-2.4) 10(-5.65,-3.2) 11(-5.65,-4) 23(5.65,-4) 24(5.65,-3.2) 25(5.65,-2.4) 26(5.65,-1.6) 27(5.65,-0.8) 28(5.65,0) 29(5.65,0.8) 30(5.65,1.6) 31(5.65,2.4) 32(5.65,3.2) 33(5.65,4)
  oval 0.55x1.75 smd: 12(-4,-5.65) 13(-3.2,-5.65) 14(-2.4,-5.65) 15(-1.6,-5.65) 16(-0.8,-5.65) 17(0,-5.65) 18(0.8,-5.65) 19(1.6,-5.65) 20(2.4,-5.65) 21(3.2,-5.65) 22(4,-5.65) 34(4,5.65) 35(3.2,5.65) 36(2.4,5.65) 37(1.6,5.65) 38(0.8,5.65) 39(0,5.65) 40(-0.8,5.65) 41(-1.6,5.65) 42(-2.4,5.65) 43(-3.2,5.65) 44(-4,5.65)
  silkscreen extent -5.77,-4.35 4.35,4.95, body extent -5,-5 5,5, height 1.2
150060YS75000 [mm]
  rect 0.85x0.85 smd: 1(-0.8,0) 2(0.8,0)
  silkscreen extent -1.53,-0.32 -1.53,0.33, body extent -0.85,-0.45 0.85,0.45, height 2.44
CAP0603 [mm] "Capacitores cerámicos de capas múltiples (MLCC) - SMD/SMT 0603 0.1uF 16volts X7R 5%"
  rect 0.9x0.9 smd: 1(-0.8,0) 2(0.8,0)
  silkscreen extent -0.15,-0.35 0.15,0.35, body extent -0.83,-0.43 0.82,0.42, height 0.85
Crystal20MHz [mm]
  rect 6x2 smd: 1(-5,0) 2(5,0)
  silkscreen extent -6.64,-2.45 6.6,2.45, body extent -6.6,-2.4 6.6,2.4, height 4.3
EEH-ZA1E101XP [mm] "EEH-ZA1E101XP"
  rect 3.5x1.2 smd: 1(-2.794,0) 2(2.794,0)
  silkscreen extent -3.5,-3.5 3.5,3.5
HDR2X3 [mm] "Connector; Header; 3x2 Position"
  rect 1.5x1.5 hole 0.9: 1(0,0)
  round 1.5 hole 0.9: 2(0,2.54) 3(2.54,0) 4(2.54,2.54) 5(5.08,0) 6(5.08,2.54)
  silkscreen extent -1.27,-1.27 6.35,3.81
LED [mm]
  round 1.6 hole 0.711: A(0,0) K(2.54,0)
  silkscreen extent -1.78,-2.54 3.56,3.05
MB6S-E3/80 [mm] "MB6S-E3/80"
  rect 1.7x0.85 smd: 1(-3,1.335) 2(-3,-1.335) 3(3,-1.335) 4(3,1.335)
  silkscreen extent -3.12,-2.45 2.05,2.45, body extent -2.05,-2.47 2.05,2.48, height 2.9
MC7805CDTRKG [mm] "MC7805CDTRKG"
  rect 3.05x1.25 smd: 1(-4.05,2.29) 3(-4.05,-2.29)
  rect 6.5x5.55 smd: 4(2.4,0)
  silkscreen extent -4.17,-3.35 -1.25,3.59, body extent -2.5,-3.37 3.72,3.37, height 2.38
microswitch [mm]
  rect 3x1.6 smd: 1(-4.59,0) 2(4.59,0)
  silkscreen extent -3,-1.75 3,1.75, body extent -3,-1.75 3,1.75, height 4.57
NPIC6C595_Q100_SOIC16 [mm]
  oval 2.2x0.6 smd: 1(-2.4,4.445) 2(-2.4,3.175) 3(-2.4,1.905) 4(-2.4,0.635) 5(-2.4,-0.635) 6(-2.4,-1.905) 7(-2.4,-3.175) 8(-2.4,-4.445) 9(2.4,-4.445) 10(2.4,-3.175) 11(2.4,-1.905) 12(2.4,-0.635) 13(2.4,0.635) 14(2.4,1.905) 15(2.4,3.175) 16(2.4,4.445)
  silkscreen extent -2.52,-5 0.9,5.42, body extent -2,-5 2,5, height 1.75
NSO8_N [mm] "SOIC, 8-Leads, Body 4.9x3.9mm, Pitch 1.27mm, IPC Medium Density"
  oval 2.2x0.6 smd: 1(-2.4,1.905) 2(-2.4,0.635) 3(-2.4,-0.635) 4(-2.4,-1.905) 5(2.4,-1.905) 6(2.4,-0.635) 7(2.4,0.635) 8(2.4,1.905)
  silkscreen extent -2.52,-2.5 0.9,2.88, body extent -1.95,-2.45 1.95,2.45, height 1.75
RES0603 [mm]
  rect 1x1 smd: 1(-0.85,0) 2(0.85,0)
  silkscreen extent -0.15,-0.4 0.15,0.4, body extent -0.9,-0.45 0.9,0.45, height 0.55
RES2512 [mm]
  rect 2x3.3 smd: 1(-3.1,0) 2(3.1,0)
  silkscreen extent -1.5,-1.55 1.5,1.55, body extent -3.15,-1.58 3.15,1.57, height 0.7
S1M-E3/5AT [mm] "S1M-E3/5AT"
  rect 2.35x1.55 smd: 1(-1.975,0) 2(1.975,0)
  silkscreen extent -3.42,-1.4 2.65,1.45, body extent -2.64,-1.4 2.64,1.39, height 2.29
SMBJ5.0A [mm]
  rect 2.35x2.2 smd: 1(-2.8,0) 2(2.8,0)
  silkscreen extent -3.57,-2 2.8,2, body extent -2.8,-1.97 2.79,1.97, height 2.44
SW712 [mm] "SM712 Series 600W Asymmetrical TVS Diode Array"
  rect 1.6x0.6 smd: 1(-0.9,0.95) 2(-0.9,-0.95) 3(0.9,0)
  silkscreen extent -1.03,-1.5 0.7,1.92, body extent -0.7,-1.52 0.7,1.52, height 1.12

## Part data
C1 C2 C4 C5 C6 C7 C9_REG1 C9_REG2 C9_REG3 C9_REG4 C12 C13: library part C0.1UF, "Capacitores cerámicos de capas múltiples (MLCC) - SMD/SMT 0603 0.1uF 16volts X7R 5%"
C3 C8: library part C18pF, "GJM0336C1E180JB01D"
C10: library part EEH-ZA1E101XP, "EEH-ZA1E101XP"
C11: library part 25SVPF47M, "25SVPF47M"
D1: library part SM712, "SM712"
D2 D3 D4 D14: library part 150060YS75000, "NPN General Purpose Amplifier"
D6_7SEG1 D6_7SEG2 D6_7SEG3 D6_7SEG4 D7_L1 D7_L2 D7_L3 D7_L4 D7_L5 D7_L6 D7_L7 D7_L8 D7_L9 D7_L10 D7_L11 D7_L12 D7_L13 D7_L14 D7_L15 D7_L16 D7_L17 D7_L18 D7_L19 D7_L20 D7_L21 D7_L22 D7_L23 D7_L24 D7_L25 D7_L26 D7_L27 D7_L28 D8_L1 D8_L2 D8_L3 D8_L4 D8_L5 D8_L6 D8_L7 D8_L8 D8_L9 D8_L10 D8_L11 D8_L12 D8_L13 D8_L14 D8_L15 D8_L16 D8_L17 D8_L18 D8_L19 D8_L20 D8_L21 D8_L22 D8_L23 D8_L24 D8_L25 D8_L26 D8_L27 D8_L28 D9_L1 D9_L2 D9_L3 D9_L4 D9_L5 D9_L6 D9_L7 D9_L8 D9_L9 D9_L10 D9_L11 D9_L12 D9_L13 D9_L14 D9_L15 D9_L16 D9_L17 D9_L18 D9_L19 D9_L20 D9_L21 D9_L22 D9_L23 D9_L24 D9_L25 D9_L26 D9_L27 D9_L28 D10_L1 D10_L2 D10_L3 D10_L4 D10_L5 D10_L6 D10_L7 D10_L8 D10_L9 D10_L10 D10_L11 D10_L12 D10_L13 D10_L14 D10_L15 D10_L16 D10_L17 D10_L18 D10_L19 D10_L20 D10_L21 D10_L22 D10_L23 D10_L24 D10_L25 D10_L26 D10_L27 D10_L28 D11_L1 D11_L2 D11_L3 D11_L4 D11_L5 D11_L6 D11_L7 D11_L8 D11_L9 D11_L10 D11_L11 D11_L12 D11_L13 D11_L14 D11_L15 D11_L16 D11_L17 D11_L18 D11_L19 D11_L20 D11_L21 D11_L22 D11_L23 D11_L24 D11_L25 D11_L26 D11_L27 D11_L28: library part HBLED, "HBLED"
D15: library part SMBJ12A-E3/52, "NPN General Purpose Amplifier"
D16: library part SMBJ5.0A, "NPN General Purpose Amplifier"
J1_BUS2 J1_BUS3: library part 15-43-6233, "Right Angle, Standard Profile, RJ45-Keyed, Flange Mount PCB Jack"
P1: library part "Header 6", "Header, 6-Pin"
R1 R2 R3 R4 R5 R8: library part RK73B1HTTC472J, "RK73B1HTTC472J"
R6_7SEG1 R6_7SEG2 R6_7SEG3 R6_7SEG4: library part CRCW2512470RJNEG, "CRCW2512470RJNEG"
R7_L1 R7_L2 R7_L3 R7_L4 R7_L5 R7_L6 R7_L7 R7_L8 R7_L9 R7_L10 R7_L11 R7_L12 R7_L13 R7_L14 R7_L15 R7_L16 R7_L17 R7_L18 R7_L19 R7_L20 R7_L21 R7_L22 R7_L23 R7_L24 R7_L25 R7_L26 R7_L27 R7_L28: library part CRCW2512120RJNEG, "CRCW2512120RJNEG"
S1: "Switch"
U1: "Low-Power, Slew-Rate-Limited RS-485/RS-422 Transceiver"
U2: "20 MHz 8-bit AVR Microcontroller with 128KB Flash, 44-Pin TQFP Pkg, Industrial Temp"
U3_REG1 U3_REG2 U3_REG3 U3_REG4: library part NPIC6C595, "Power logic 8-bit shift register; open-drain outputs"
Y1: "Crystal Oscillator"

## Free pads (board coordinates)
  oct 250x250 hole 125: 0(3967.91,2265.87) 0(3967.91,4824.92) 0(6240.16,2265.88) 0(6240.17,4824.92) 0(9893.7,2265.87) 0(9893.7,4824.92) 0(11792.13,2265.87) 0(11792.13,4824.92)
  round 39.37 smd mask+39.37: 1(457.44,5936.88) 1(551.18,314.96) 1(15811.77,5228.22) 1(16259.84,196.85)
  round 39.37 smd far side mask+39.37: 1(457.44,5936.88) 1(551.18,314.96) 1(15811.77,5228.22) 1(16259.84,196.85)
  round 39.37 smd mask+29.53: 1(14598.43,2273.99) 1(15129.46,1741.98)

## Via types
v1: diameter 50, hole 28, Top Layer to Bottom Layer, 68 vias
v2: diameter 50, hole 27.99, Top Layer to Bottom Layer, 2 vias

## Nets (pads, with @x,y where several pads share a name; then routed paths per layer and width w, separated by ;. In a path a pad name is that pad's centre, name@x,y a point inside that pad or via, vN(x,y) a via of type N, cw(c..) or ccw(c..) an arc to the next point about the centre after c; other vN are vias at no path point)
20MHZ_1: C3.1 U2.8 Y1.2 | length 866.9
  Top Layer w15: U2.8@15085.99,2071.04 15207.49,2071.04 15287.45,2151 15287.45,2416 15349.3,2477.85 15550.6,2477.85 15582.45,2446 C3.1@15582.45,2412.5
20MHZ_2: C8.1 U2.7 Y1.1 | length 561.6
  Top Layer w15: U2.7@15085.99,2039.54 15285.99,2039.54 15332.45,2086 15422.45,2086 15552.45,2086 15582.45,2116 C8.1@15582.45,2149.5
A: D1.1 J1_BUS2.4 J1_BUS3.4 U1.6 | length 3210.3
  Top Layer w15: U1.6@14487.45,3205.49 14487.45,3261 14532.45,3306 14774.61,3306 14874.61,3206 15282.45,3206 D1.1@15375.05,3298.6 ; J1_BUS2.4@15735.28,4149.39 15690.83,4149.39 15662.45,4121 15662.45,3846 15792.45,3716 16132.45,3716 16207.45,3641 16207.45,3471 16152.45,3416 16032.45,3416 15902.45,3286 J1_BUS3.4@15745.38,3286
  Top Layer w25: 15357.45,3275.99 15452.45,3275.99
  Top Layer w30: D1.1@15375.05,3298.6 15644.89,3298.6 15657.49,3286 J1_BUS3.4@15745.38,3286
B: D1.2 J1_BUS2.6 J1_BUS3.6 U1.7 | length 2920
  Top Layer w15: U1.7@14437.45,3205.49 14437.45,3276 14532.45,3371 14772.45,3371 14877.45,3476 15272.45,3476 15352.45,3396 ; J1_BUS2.6@15735.28,4249.39 15670.83,4249.39 15602.45,4181 15602.45,3786 15742.45,3646 15892.45,3646 15957.45,3581 15957.45,3446 15897.45,3386 J1_BUS3.6@15747.45,3386
  Top Layer w25: 15352.45,3396 15427.45,3396
  Top Layer w30: D1.2@15375.05,3373.4 15644.85,3373.4 15657.45,3386 J1_BUS3.6@15747.45,3386
CLK: P1.3 U2.3 U3_REG1.15 U3_REG2.15 U3_REG3.15 U3_REG4.15 | length 14987.1
  Top Layer w15: U3_REG1.15@3083.32,426.51 3083.32,356 v1(3148.32,291) ; U3_REG2.15@6406.03,426.51 6406.03,356 v1(6471.03,291) ; U3_REG3.15@9728.74,426.51 9728.74,356 v1(9793.74,291) ; U3_REG4.15@13051.45,426.51 13051.45,356 v1(13116.45,291) ; U2.3@15085.99,1913.56 15179.89,1913.56 15522.45,1571 15522.45,1321 P1.3@15472.45,1271
  Bottom Layer w15: v1(3148.32,291) 3578.32,291 3718.32,431 ; 5751.03,431 5891.03,291 6901.03,291 7041.03,431 ; 9073.74,431 9213.74,291 10223.74,291 10363.74,431 ; 12396.45,431 12536.45,291 13546.45,291 13686.45,431 ; 15247.45,431 15472.45,656 P1.3@15472.45,1271
  Bottom Layer w50: 3718.32,431 5751.03,431 ; 7041.03,431 9073.74,431 ; 10363.74,431 12396.45,431 ; 13686.45,431 15247.45,431
COM_485_EN: R1.1 U1.2 U1.3 U2.14 | length 1545.3
  Top Layer w15: U1.2@14437.45,3016.51 U1.3@14487.45,3016.51 14487.45,2936 14467.45,2916 R1.1@14467.45,2844.46 14498.98,2844.46 14517.45,2826 14517.45,2701 14652.45,2566 15102.45,2566 15147.45,2521 15147.45,2421 15122.45,2396 15022.45,2396 14957.45,2331 U2.14@14957.45,2230.49
DI: R3.2 U1.4 U2.10 | length 1629.7
  Top Layer w15: U1.4@14537.45,3016.51 14537.45,2951 14572.45,2916 14627.45,2916 14662.45,2881 R3.2@14662.45,2844.46 14605.91,2844.46 14587.45,2826 14587.45,2711 14677.45,2621 15127.45,2621 15192.45,2556 15192.45,2171 15155.48,2134.03 U2.10@15085.99,2134.03
DOT_7SEG1: R6_7SEG1.2 U3_REG1.14 | length 2249.1
  Top Layer w15: R6_7SEG1.2@1388.44,856.07 1388.44,768.12 1545.56,611 2360.32,611 2481.32,490 2481.32,338 2638.32,181 2928.32,181 3033.32,286 U3_REG1.14@3033.32,426.51
DOT_7SEG2: R6_7SEG2.2 U3_REG2.14 | length 2249.1
  Top Layer w15: R6_7SEG2.2@4711.15,856.07 4711.15,768.12 4868.26,611 5683.03,611 5804.03,490 5804.03,338 5961.03,181 6251.03,181 6356.03,286 U3_REG2.14@6356.03,426.51
DOT_7SEG3: R6_7SEG3.2 U3_REG3.14 | length 2249.1
  Top Layer w15: R6_7SEG3.2@8033.86,856.07 8033.86,768.12 8190.97,611 9005.74,611 9126.74,490 9126.74,338 9283.74,181 9573.74,181 9678.74,286 U3_REG3.14@9678.74,426.51
DOT_7SEG4: R6_7SEG4.2 U3_REG4.14 | length 2249.1
  Top Layer w15: R6_7SEG4.2@11356.56,856.07 11356.56,768.12 11513.68,611 12328.45,611 12449.45,490 12449.45,338 12606.45,181 12896.45,181 13001.45,286 U3_REG4.14@13001.45,426.51
EXTSUPP: C10.1 C12.1 D6_7SEG1.A D6_7SEG2.A D6_7SEG3.A D6_7SEG4.A D7_L1.A D7_L2.A D7_L3.A D7_L4.A D7_L5.A D7_L6.A D7_L7.A D7_L8.A D7_L9.A D7_L10.A D7_L11.A D7_L12.A D7_L13.A D7_L14.A D7_L15.A D7_L16.A D7_L17.A D7_L18.A D7_L19.A D7_L20.A D7_L21.A D7_L22.A D7_L23.A D7_L24.A D7_L25.A D7_L26.A D7_L27.A D7_L28.A D12.1 D13.4 D15.1 U4.1 | length 66388.8
  Top Layer w15: C12.1@15072.45,5102.5 15128.94,5102.5 15207.45,5181 C10.1@15272.45,5181
  Top Layer w25: D6_7SEG1.A@1045.46,1576.91 1045.46,1834.9 ; D7_L5.A@1486.41,5317.06 1486.41,5490 ; D7_L3.A@1565.15,3348.56 1565.15,3473.82 ; D7_L1.A@3415.48,1576.91 3415.48,1726.91 ; D7_L6.A@3612.26,5317.06 3612.26,5490 ; D7_L2.A@3691,3348.56 3691,3468.56 ; D6_7SEG2.A@4368.17,1576.91 4368.17,1834.9 ; D7_L12.A@4809.11,5317.06 4809.11,5490 ; D7_L10.A@4887.85,3348.56 4887.85,3473.82 ; D7_L8.A@6738.18,1576.91 6738.18,1726.91 ; D7_L13.A@6934.97,5317.06 6934.97,5490 ; D7_L9.A@7013.71,3348.56 7013.71,3468.56 ; D6_7SEG3.A@7690.88,1576.91 7690.88,1834.9 ; D7_L19.A@8131.82,5317.06 8131.82,5490 ; D7_L17.A@8210.56,3348.56 8210.56,3473.82 ; D7_L15.A@10060.89,1576.91 10060.89,1702.89 ; D7_L20.A@10257.68,5317.06 10257.68,5490 ; D7_L16.A@10336.42,3348.56 10336.42,3468.56 ; D6_7SEG4.A@11013.58,1576.91 11013.58,1834.9 ; D7_L26.A@11454.53,5317.06 11454.53,5490 ; D7_L24.A@11533.27,3348.56 11533.27,3473.82 ; D7_L22.A@13383.6,1576.91 13383.6,1726.91 ; D7_L27.A@13580.38,5317.06 13580.38,5490 ; D7_L23.A@13659.12,3348.56 13659.12,3468.56
  Top Layer w50: 1045.46,1834.9 1075.56,1865 1075.56,2149 1003.56,2221 1003.56,2493 1083.56,2573 1083.56,2963 1011.56,3035 1011.56,3307 1091.56,3387 1091.56,3777 1019.56,3849 1019.56,4121 1099.56,4201 1099.56,4591 1027.56,4663 1027.56,4935 1107.56,5015 1107.56,5405 1035.56,5477 1035.56,5676.11 1110.45,5751 15127.45,5751 15272.45,5606 C10.1@15272.45,5186 ; 1486.41,5410 1486.41,5750 ; 1565.15,3473.82 1812.32,3721 3256.85,3721 ; D7_L7.A@3256.85,5513.91 3256.85,3721 ; D7_L7.A@3258,5513.91 3612.26,5513.91 ; D7_L4.A@3336.74,3545.41 3336.74,1805.65 3415.48,1726.91 ; D7_L4.A@3336.74,3551 3590,3551 3691,3450 ; D7_L4.A@3341.85,3540.3 3331.85,3550.3 3331.85,3646 3256.85,3721 ; 3612.26,5410 3612.26,5750 ; 4358.26,5749 4358.26,5477 4430.26,5405 4430.26,5015 4350.26,4935 4350.26,4663 4422.26,4591 4422.26,4201 4342.26,4121 4342.26,3849 4414.26,3777 4414.26,3387 4334.26,3307 4334.26,3035 4406.26,2963 4406.26,2573 4326.26,2493 4326.26,2221 4398.26,2149 4398.26,1865 4368.17,1834.9 ; 4809.11,5410 4809.11,5750 ; 4887.85,3473.82 5135.03,3721 6579.55,3721 ; D7_L14.A@6579.55,5513.91 6579.55,3721 ; D7_L14.A@6580.7,5513.91 6934.97,5513.91 ; D7_L11.A@6659.44,3545.41 6659.45,1805.63 6738.18,1726.91 ; D7_L11.A@6659.44,3551 6912.71,3551 7013.71,3450 ; D7_L11.A@6664.55,3540.3 6654.55,3550.3 6654.55,3646 6579.55,3721 ; 6934.97,5410 6934.97,5750 ; 7680.97,5749 7680.97,5477 7752.97,5405 7752.97,5015 7672.97,4935 7672.97,4663 7744.97,4591 7744.97,4201 7664.97,4121 7664.97,3849 7736.97,3777 7736.97,3387 7656.97,3307 7656.97,3035 7728.97,2963 7728.97,2573 7648.97,2493 7648.97,2221 7720.97,2149 7720.97,1865 7690.88,1834.9 ; 8131.82,5410 8131.82,5750 ; 8210.56,3473.82 8457.74,3721 9902.26,3721 ; D7_L21.A@9902.26,5513.91 9902.26,5229.03 9629.92,4956.69 9629.92,4649.61 9902.26,4377.26 9902.26,3721 ; D7_L21.A@9903.41,5513.91 10257.68,5513.91 ; D7_L18.A@9982.15,3545.41 9982.15,2753.81 9649.61,2421.26 9649.61,2114.17 10060.89,1702.89 ; D7_L18.A@9982.15,3551 10235.42,3551 10336.42,3450 ; D7_L18.A@9987.26,3540.3 9977.26,3550.3 9977.26,3646 9902.26,3721 ; 10257.68,5410 10257.68,5750 ; 11003.68,5749 11003.68,5477 11075.68,5405 11075.68,5015 10995.68,4935 10995.68,4663 11067.68,4591 11067.68,4201 10987.68,4121 10987.68,3849 11059.68,3777 11059.68,3387 10979.68,3307 10979.68,3035 11051.68,2963 11051.68,2573 10971.68,2493 10971.68,2221 11043.68,2149 11043.68,1865 11013.58,1834.9 ; 11454.53,5410 11454.53,5750 ; 11533.27,3473.82 11780.45,3721 13224.97,3721 ; D7_L28.A@13224.97,5513.91 13224.97,3721 ; D7_L28.A@13226.12,5513.91 13580.38,5513.91 ; D7_L25.A@13304.86,3545.41 13304.86,1805.65 13383.6,1726.91 ; D7_L25.A@13304.86,3551 13558.12,3551 13659.12,3450 ; D7_L25.A@13309.97,3540.3 13299.97,3550.3 13299.97,3646 13224.97,3721 ; 13580.38,5410 13580.38,5750 ; D15.1@14832.45,4686.24 14832.45,4756 14867.45,4791 14992.45,4791 15032.45,4751 15032.45,4616 15058.94,4589.51 15210.95,4589.51 15269.89,4648.44 ; 14912.45,5731 U4.1@14912.61,5230.45 ; D13.4@15269.89,4689.11 15269.89,4783.44 15367.45,4881 15367.45,5141 15327.45,5181 C10.1@15272.45,5181
GND: C1.2 C2.2 C3.2 C4.2 C5.2 C6.2 C7.2 C8.2 C9_REG1.2 C9_REG2.2 C9_REG3.2 C9_REG4.2 C10.2 C11.2 C12.2 C13.2 D1.3 D13.3 D15.2 D16.2 P1.6 R1.2 R8.2 S1.2 U1.5 U2.6 U2.18 U2.28 U2.39 U3_REG1.8 U3_REG1.16 U3_REG2.8 U3_REG2.16 U3_REG3.8 U3_REG3.16 U3_REG4.8 U3_REG4.16 U4.4 | length 1703.3
  Top Layer w10: v1(15122.45,3336) D1.3@15304.18,3336
  Top Layer w15: 2779.32,701 2783.32,697 U3_REG1.8@2783.32,615.49 ; 6102.03,701 6106.03,697 U3_REG2.8@6106.03,615.49 ; 9424.74,701 9428.74,697 U3_REG3.8@9428.74,615.49 ; 12747.45,701 12751.45,697 U3_REG4.8@12751.45,615.49 ; C1.2@14272.45,3252.5 v1(14272.45,3386) ; U1.5@14537.45,3205.49 v1@14662.45,3205.49 ; 14552.45,2008.05 14705.4,2008.05 14722.45,1991 ; 14817.45,2306 14831.65,2291.8 14831.65,2130.2 ; 14863.55,1931 14863.55,1699.9 14872.45,1691 ; 15007.45,2036 15035.4,2008.05 15255.4,2008.05 15292.45,1971
  other v1: 3489.32,371 6812.03,371 10134.74,371 13457.45,371 15282.45,601 15659.85,1448.56 14832.45,1501 15232.45,1521 14432.45,1891 15582.45,1991 14505.45,2172 15682.45,2291 15062.45,2321 14962.45,2471 14488.19,2559.06 14872.45,2731 14642.45,2981 14662.45,3206 14522.45,4221 14622.45,4221 14822.45,4221 14922.45,4221 14522.45,4321 14622.45,4321 14822.45,4321 14922.45,4321 14272.45,4726 14022.45,4871 14122.45,4871 15472.45,4871 15572.45,4871 14772.45,4921 14872.45,4921 14022.45,4971 14122.45,4971 15472.45,4971 15572.45,4971 14772.45,5021 14872.45,5021
  other v2: 14921.73,1940.94